# Altium PCB PCB1.PcbDoc (part 1 of 2)
Units mm, origin at the board's own origin, x right, y up, seen from the top; angles counter-clockwise.
Board outline 92.01 x 103.4 mm, 2 copper layers (Top Layer, Bottom Layer), stack 1.569 mm thick; 57 components, 56 nets, 293 pads, 87 vias.
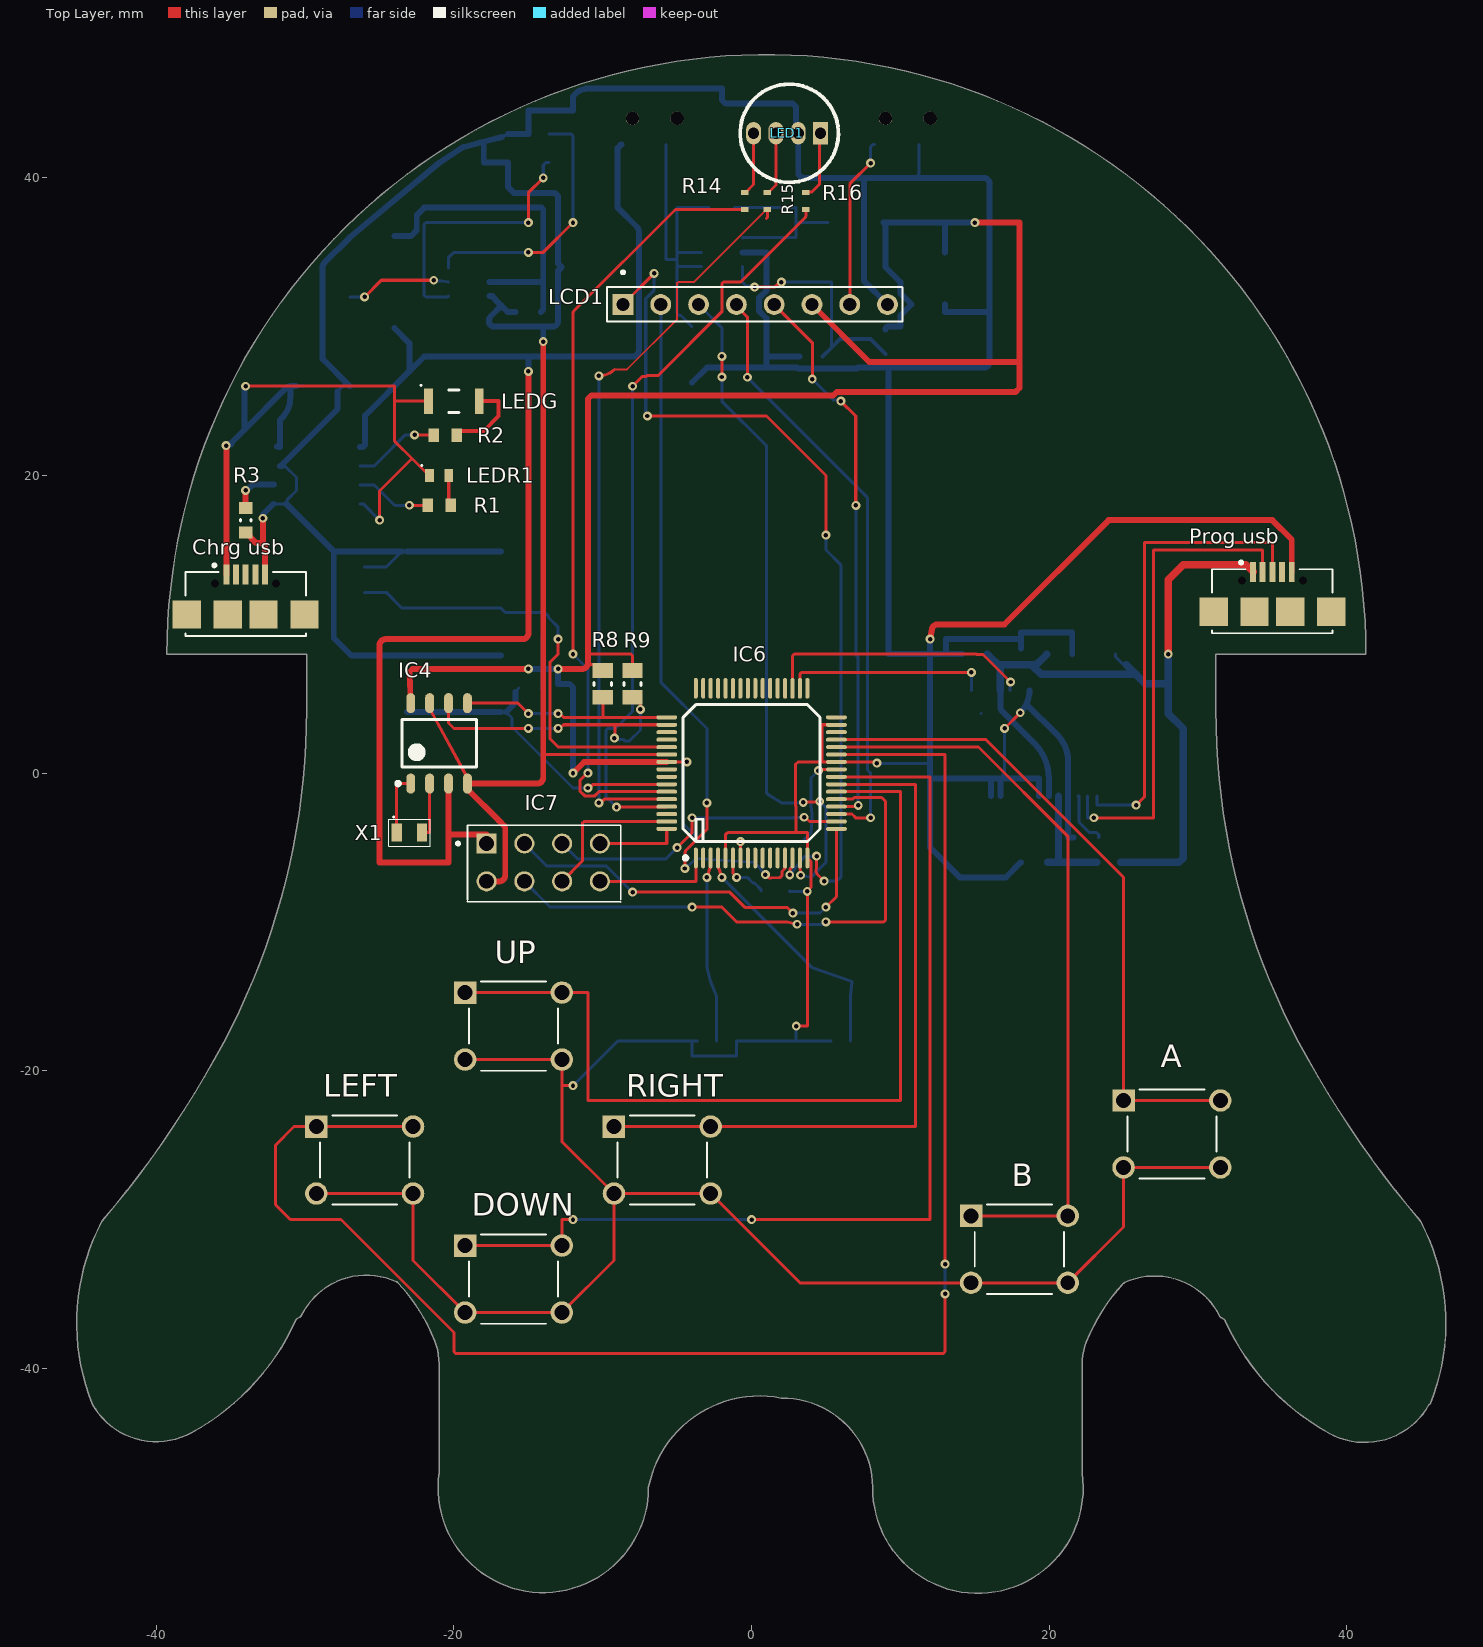
[diagram p0: Top Layer view]
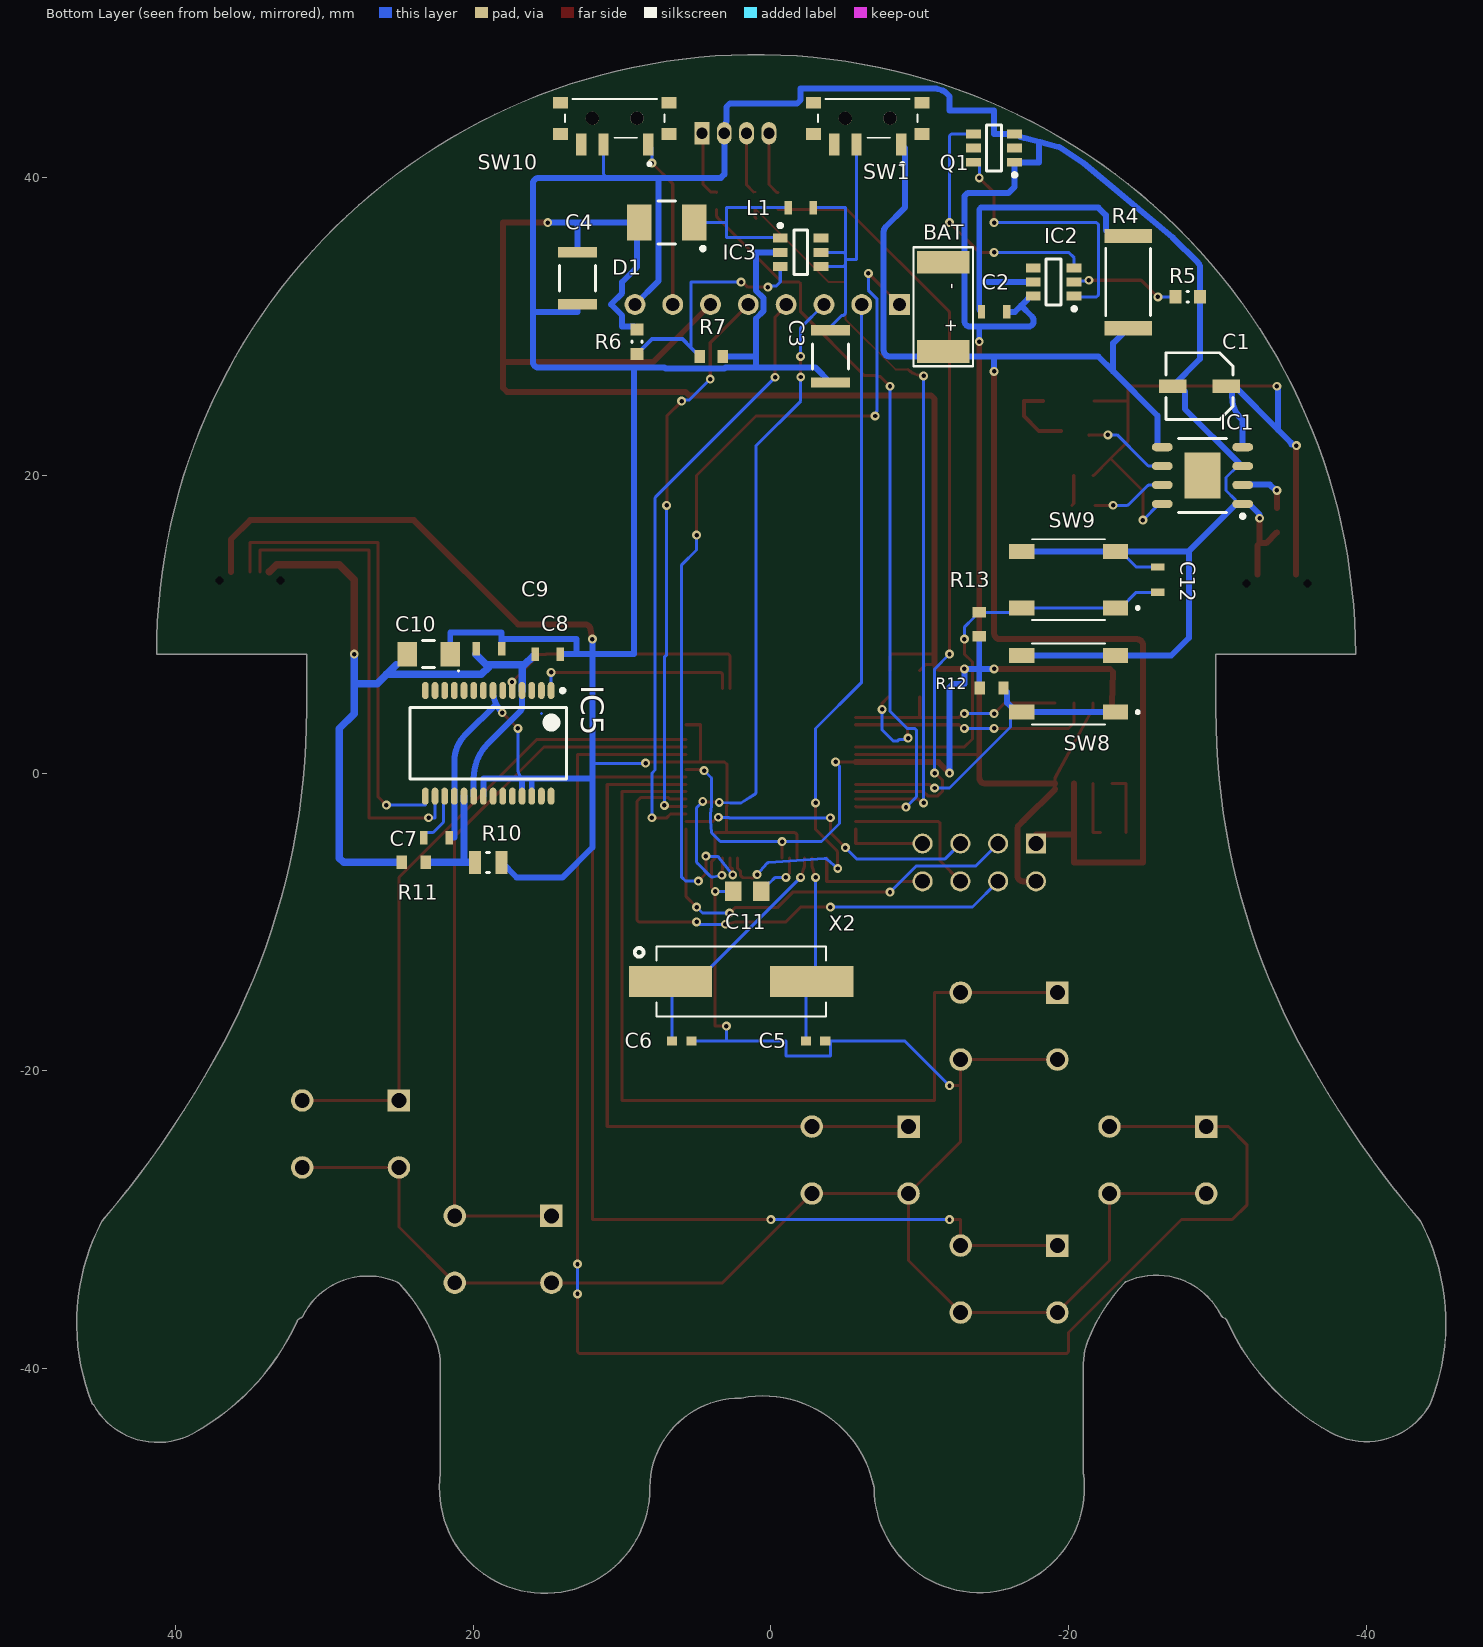
[diagram p1: Bottom Layer view, seen from below]
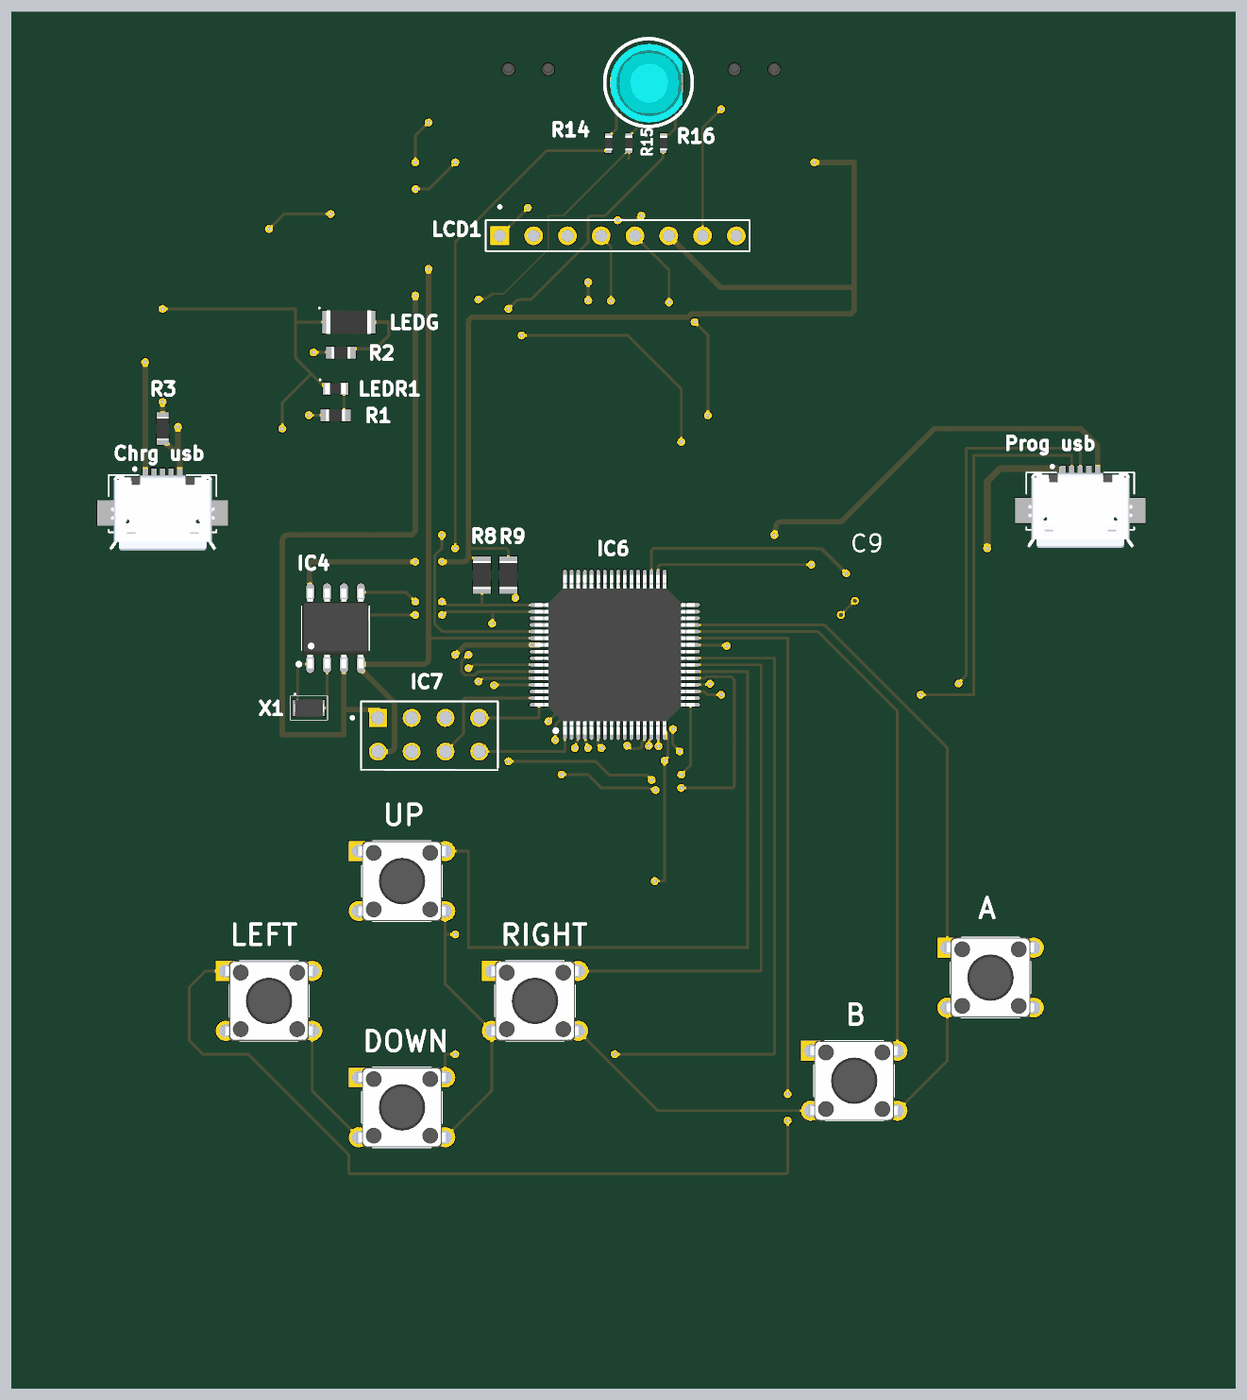
[diagram p2: 3D render of the assembled board from above, using the file's embedded part models]
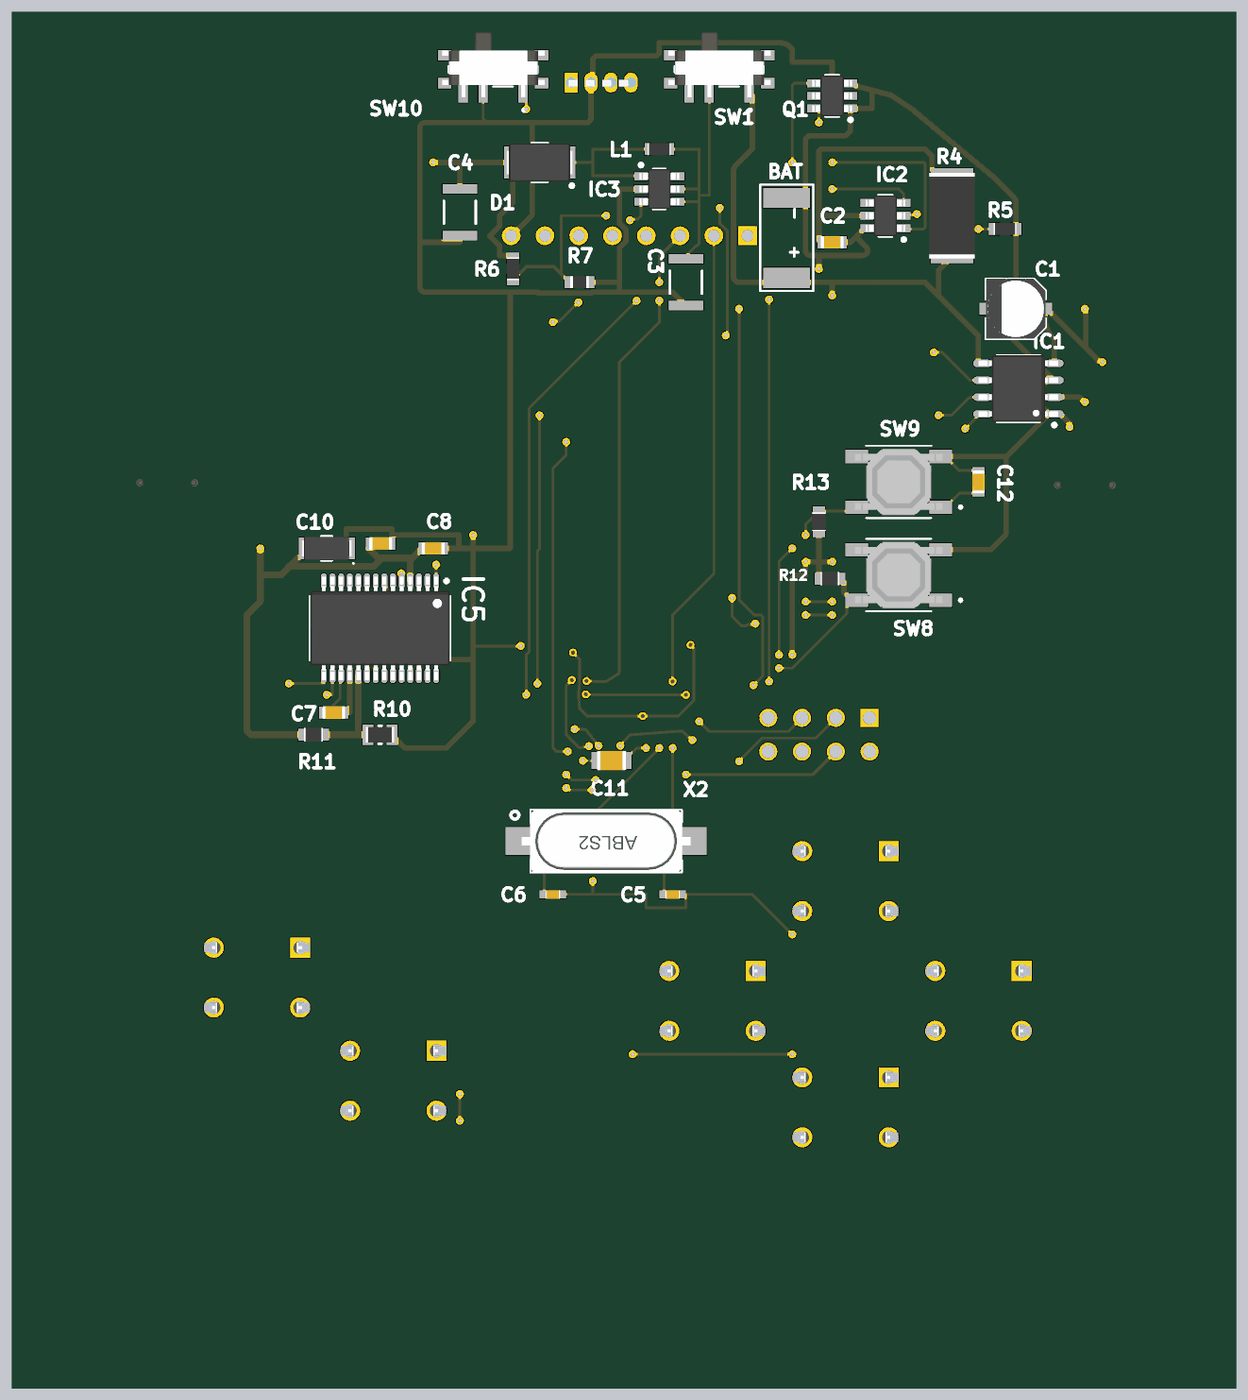
[diagram p3: 3D render of the assembled board from below, using the file's embedded part models]

## Layer stack, top to bottom
Top Solder: solder mask 0.0254, SM-001, Dk 4
Top Layer: signal copper 0.035
Dielectric 1: core 1.4986, Core-043, Dk 4.3
Bottom Layer: signal copper 0.035
Bottom Solder: solder mask 0.0254, SM-001, Dk 4

## Board outline
-44.314,-42.386 ccw(c-40,-40) -37.636,-44.326 ccw(c-45.406,-30.107) -30.633,-36.765 cw(c-30.401,-36.87) -30.522,-36.646 -30.357,-36.556 -30.356,-36.556 ccw(c-30.479,-36.333) -30.252,-36.447 cw(c-25.882,-38.619) -23.868,-34.174 cw(c-23.973,-34.405) -23.788,-34.23 cw(c-32.881,-42.76) -21.289,-38.172 cw(c-25.119,-39.687) -21,-39.687 -21,-47 ccw(c-14,-48) -6.929,-48 cw(c0.536,-49.464) 2,-42 cw(c2.069,-48.07) 8.14,-48.001 ccw(c15.211,-48.053) 22.211,-47.053 22.211,-39.742 22.211,-39.741 cw(c26.33,-39.74) 22.5,-38.225 cw(c34.092,-42.814) 24.999,-34.284 cw(c25.184,-34.458) 25.079,-34.227 cw(c27.093,-38.672) 31.463,-36.5 ccw(c31.69,-36.386) 31.567,-36.609 31.568,-36.609 31.733,-36.7 cw(c31.612,-36.923) 31.844,-36.818 ccw(c46.616,-30.16) 38.847,-44.38 ccw(c41.211,-40.053) 45.525,-42.439 45.616,-42.386 ccw(c32.061,-36.964) 44.959,-30.125 ccw(c44.735,-30.245) 44.929,-30.082 44.928,-30.081 cw(c96.298,13.612) 36.775,-18.088 cw(c78.709,4.245) 31.199,4.247 31.199,8 31.287,8 41.287,8 ccw(c1,8) -39.287,8 -29.897,8 -29.897,4.247 cw(c-77.408,4.245) -35.474,-18.088 cw(c-94.997,13.612) -43.627,-30.081 -43.628,-30.082 ccw(c-43.434,-30.245) -43.658,-30.125 ccw(c-30.76,-36.964)

## Design rules (kind name [scope] priority, off if disabled: settings)
BoardOutlineClearance [All] p1: gap=0.2 ignorepadtopadclearanceinfootprint=FALSE
Clearance [All] p1: gap=0.127 ignorepadtopadclearanceinfootprint=FALSE except(0.25: Arc-Hole Track-Hole SMDPad-Hole THPad-Hole Via-Hole Fill-Hole Poly-Hole Region-Hole Text-Hole)
ComponentClearance [All] p1: gap=0.127 collisioncheckmode=3 verticalgap=0.127 showdistances=TRUE
DiffPairsRouting [All] p1: maxlimit=0.254 minlimit=0.127 mostfreqgap=0.127 toplayer_minwidth=0.127 toplayer_maxwidth=25.4 toplayer_prefwidth=0.127 bottomlayer_minwidth=0.127 bottomlayer_maxwidth=25.4 bottomlayer_prefwidth=0.127 maxuncoupledlength=12.7
Height [All] p1: minheight=0 maxheight=1816.048 prefheight=12.7
HoleSize [All] p1: absolutevalues=TRUE maxlimit=6.3 minlimit=0.3 maxpercent=80.000 minpercent=20.000
HoleToHoleClearance [All] p1: gap=0.25 allowstackedmicrovias=FALSE
MinimumAnnularRing [All] p1: minimumring=0.076
MinimumSolderMaskSliver [All] p1: minsoldermaskwidth=0
PlaneClearance [All] p1: clearance=0.127
PlaneConnect PlaneConnectPowerPads [InPadClass('PowerPads')] p1: planeconnectstyle=Direct reliefexpansion=0.508 reliefentries=4 reliefconductorwidth=0.254 reliefairgap=0.254
PlaneConnect [All] p2: pad.planeconnectstyle=Relief pad.reliefexpansion=0.3 pad.reliefentries=4 pad.reliefconductorwidth=0.127 pad.reliefairgap=0.127 via.planeconnectstyle=Direct via.reliefexpansion=0.3 via.reliefentries=4 via.reliefconductorwidth=0.127 via.reliefairgap=0.127
PolygonConnect PolygonConnectPowerPads [All vs (InPadClass('PowerPads'))] p1: connectstyle=Direct reliefconductorwidth=0.254 reliefentries=4 polygonreliefangle="90 Angle" airgapwidth=0.254
PolygonConnect [All] p2: thpad.connectstyle=Relief thpad.reliefconductorwidth=0.127 thpad.reliefentries=4 thpad.polygonreliefangle="90 Angle" thpad.airgapwidth=0.127 smdpad.connectstyle=Relief smdpad.reliefconductorwidth=0.127 smdpad.reliefentries=4 smdpad.polygonreliefangle="90 Angle" smdpad.airgapwidth=0.127 via.connectstyle=Direct via.reliefconductorwidth=0.127 via.reliefentries=4 via.polygonreliefangle="90 Angle" via.airgapwidth=0.127
RoutingVias [All] p1: holewidth=0.3 width=0.6 viastyle="Through Hole" minholewidth=0.3 minwidth=0.6 maxholewidth=0.6 maxwidth=6.6
SilkToSilkClearance [All] p1: silktosilkclearance=0
SilkToSolderMaskClearance [IsPad] p1: minsilkscreentomaskgap=0.127 clearancetoexposedcopper=TRUE
SolderMaskExpansion [All] p1: expansion=0.075 istentingtop=FALSE
Width [All] p1: maxlimit=25.4 minlimit=0.127 preferedwidth=0.127 minimp=50.000000 maximp=50.000000 favimp=50.000000
20 further rules are at their usual default settings.

## Components (designator, comment, footprint, x,y, rotation, side; value= is the part's Value field where it differs from the comment)
A "Push button" "TACTILE BUTTON" 28.25,-24.25 r0 top (schematic designator SW7)
B "Push button" "TACTILE BUTTON" 18,-32 r0 top (schematic designator SW6)
BAT "LIPO Battery" "LIPO BATTERY PADS" -11.578,31.334 r90 bottom
C1 "10µF" ELCO -28.8,26 r0 bottom
C2 "0.1µF/100nF" MC0603B104K250CT -15,31 r180 bottom
C3 "22µF" 1210ZC226KAT2A -4,28 r270 bottom
C4 "22µF" 1210ZC226KAT2A 13,33.25 r270 bottom
C5 "33pF" 250R07S330JV4T -3,-18 r180 bottom
C6 "33pF" 250R07S330JV4T 6,-18 r180 bottom
C7 "0.1µF/100nF" MC0603B104K250CT 22.48,-4.338 r180 bottom
C8 "0.1µF/100nF" MC0603B104K250CT 15,8 r180 bottom
C9 "0.1µF/100nF" MC0603B104K250CT 18.953,8.361 r180 bottom
C10 "4.7µF" TMCUA1C475KTRF 23,8 r0 bottom
C11 "220nF" C0805C224K5RACTU 1.594,-7.937 r0 bottom
C12 "0.1µF/100nF" MC0603B104K250CT -26,13 r90 bottom
"Chrg usb" "61300411121" "MICRO USB - TYPE B" -34,12 r0 top (schematic designator USB1)
D1 "SS34" 1N5822 7,37 r0 bottom
DOWN "Push button" "TACTILE BUTTON" -16,-34 r0 top (schematic designator SW4)
IC1 "TP4056" HSOP08 -29,20 r0 bottom
IC2 "FS312F-G" SOT95P280X145-6N -19,33 r0 bottom
IC3 "MT3608" SOT23-6 -2,35 r180 bottom
IC4 "DS1307" DS1307 -21,2 r90 top
IC5 "FT232RL" SSOP28 19,2 r270 bottom
IC6 "XC888" "XC888 - 3" 0,0 r90 top
IC7 "NRF24L01" "NRF header" -14,-6 r0 top
L1 "22µH" MLZ1608 -2,38 r0 bottom
LCD1 "Nokia LCD" "LCD header" 0.249,31.488 r0 top
LED1 "RGB LED" ? 1.635,43 r270 top
LEDG "LEDG" KPT-3216SGC -20,25 r0 top
LEDR1 "LEDR" LSQ976-Z -21,20 r0 top
LEFT "Push button" "TACTILE BUTTON" -26,-26 r0 top (schematic designator SW5)
"Prog usb" "USB header" "MICRO USB - TYPE B" 35,12.187 r0 top (schematic designator USB2)
Q1 "FS8205" SOT95P280X145-6N -15,42 r0 bottom
R1 "1K" RK73H-0603 -21,18 r0 top
R2 "1K" RK73H-0603 -20.587,22.704 r0 top
R3 "2K" RC0603FR-072KL -34,17 r90 top
R4 "100" CRGP2512 -24,33 r270 bottom
R5 "2K" RC0603FR-072KL -28,32 r0 bottom
R6 "7.5K" RC0603FR-072KL 9,29 r90 bottom
R7 "1K" RK73H-0603 4,28 r0 bottom
R8 "RC0805FR-0710KL" RESC2013X60X35NL10T20 -10,6 r90 top
R9 "RC0805FR-0710KL" RESC2013X60X35NL10T20 -8,6 r90 top
R10 "10K" RC0805 19,-6 r0 bottom
R11 "4K7 R" PCF0603 24,-6 r0 bottom
R12 "4K7 R" PCF0603 -14.83,5.717 r0 bottom
R13 "4K7 R" PCF0603 -14,10 r270 bottom
R14 "270R" CRG0402F -0.468,38.451 r90 top
R15 "270R" CRG0402F 1.063,38.451 r90 top
R16 "270R" CRG0402F 3.647,38.451 r90 top
RIGHT "Push button" "TACTILE BUTTON" -6,-26 r0 top (schematic designator SW3)
SW1 "Toggle Switch" "SMD Switch" -6.5,43.65 r0 bottom
SW8 "SMD button" "TACTILE BUTTON - duplicate" -20,6 r0 bottom
SW9 "SMD button" "TACTILE BUTTON - duplicate" -20,13 r0 bottom
SW10 "Toggle Switch" "SMD Switch" 10.5,43.65 r0 bottom
UP "Push button" "TACTILE BUTTON" -16,-17 r0 top (schematic designator SW2)
X1 "32.76 KHZ" FC-12M -23,-4 r0 top
X2 "11.0592MHz" HC-49/SM 2,-14 r180 bottom

## Footprints (in the part's own frame and the unit in brackets; to place one, negate y for a bottom-side part, rotate by r counter-clockwise, add the part's x,y. Pads: shape width x height; smd on the part's side, far side on the other; paste and mask are expansions set on the pad)
1N5822 [mm] "1N5822 - SS34"
  rect 1.65x2.4 smd: 1(-1.85,0) 2(1.85,0)
  silkscreen extent -2.55,-1.45 0.6,1.87, body extent -2.52,-1.45 2.52,1.45, height 2.44
250R07S330JV4T [mm] "250R07S330JV4T - 0402 Capacitor"
  rect 0.68x0.6 smd: 1(-0.65,0) 2(0.65,0)
  body extent -0.56,-0.33 0.56,0.33, height 0.61
1210ZC226KAT2A [mm] "1210ZC226KAT2A - 1210 SMD capacitor"
  rect 0.7x2.6 smd: 1(-1.75,0) 2(1.75,0)
  silkscreen extent -0.85,-1.2 0.85,1.2, body extent -1.85,-1.4 1.85,1.4, height 0.25
C0805C224K5RACTU [mm] "C0805C224K5RACTU - 0805 SMD Capacitor"
  rect 1.1x1.3 smd: 1(-0.95,0) 2(0.95,0)
  body extent -1.1,-0.72 1.1,0.72, height 1.4
CRG0402F [mm] "CRG0402F - 0402 SMD Resistor"
  rect 0.35x0.5 smd: 1(-0.575,0) 2(0.575,0)
  body extent -0.55,-0.28 0.55,0.28, height 0.4
CRGP2512 [mm] "CRGP 2512 - SMD Resistor"
  rect 0.95x3.2 smd: 1(-3.1,0) 2(3.1,0)
  silkscreen extent -2.25,-1.5 2.25,1.5, body extent -3.22,-1.7 3.22,1.7, height 0.65
DS1307 [mm] "DS1307"
  oval 1.35x0.6 smd: 1(-2.7,1.905) 2(-2.7,0.635) 3(-2.7,-0.635) 4(-2.7,-1.905) 5(2.7,-1.905) 6(2.7,-0.635) 7(2.7,0.635) 8(2.7,1.905)
  silkscreen extent -2.82,-2.5 1.6,2.88, body extent -3,-2.5 3,2.5, height 1.75
ELCO [mm] "ELCO CAP"
  rect 1.85x0.9 smd: 1(-1.8,0) 2(1.8,0)
  silkscreen extent -2.25,-2.25 2.25,2.25, body extent -2.42,-2.25 2.42,2.25, height 6.1
FC-12M [mm] "FC-12M - Clock"
  rect 0.7x1.2 smd: 1(-0.85,0) 2(0.85,0)
  silkscreen extent -1.39,-0.9 1.4,1.1, body extent -1.11,-0.65 1.11,0.65, height 0.6
HC-49/SM [mm] "Crystal 11.0592MHz"
  rect 5.6x2.1 smd: 1(-4.75,0) 2(4.75,0)
  silkscreen extent -7.15,-2.35 5.7,2.35, body extent -6.35,-2.35 6.35,2.35, height 3.18
HSOP08 [mm] "SOP8 - TP4056"
  oval 1.4x0.55 smd: 1(-2.7,1.905) 2(-2.7,0.635) 3(-2.7,-0.635) 4(-2.7,-1.905) 5(2.7,-1.905) 6(2.7,-0.635) 7(2.7,0.635) 8(2.7,1.905)
  rect 2.41x3.1 smd: 9(0,0)
  silkscreen extent -2.82,-2.5 1.6,2.85, body extent -3,-2.5 3,2.5, height 1.7
KPT-3216SGC [mm] "SMD led"
  rect 0.6x1.7 smd: 1(-1.7,0) 2(1.7,0)
  silkscreen extent -2.26,-0.75 0.35,1.11, body extent -1.7,-0.9 1.7,0.9, height 0.95
"LCD header" [mm] "LCD header"
  rect 1.398x1.398 hole 0.89: 1(-8.89,0)
  round 1.398 hole 0.89: 2(-6.35,0) 3(-3.81,0) 4(-1.27,0) 5(1.27,0) 6(3.81,0) 7(6.35,0) 8(8.89,0)
  silkscreen extent -9.96,-1.14 9.91,2.27
"LIPO BATTERY PADS" [mm]
  rect 1.524x3.524 smd: 1(-3,0) 2(3,0)
  silkscreen extent -4,-2 4,2
LSQ976-Z [mm] "SMD - Led"
  rect 0.6x0.9 smd: 1(-0.65,0) 2(0.65,0)
  silkscreen extent -1.21,0.61 -1.11,0.71, body extent -0.8,-0.42 0.8,0.42, height 0.84
MC0603B104K250CT [mm] "0603 Capacitor"
  rect 0.5x0.9 smd: 1(-0.85,0) 2(0.85,0)
  body extent -0.87,-0.48 0.87,0.48, height 0.6
"MICRO USB - TYPE B" [mm] "Micro USB - Type B"
  rect 0.4x1.35 smd: 1(-1.3,1.338) 2(-0.65,1.338) 3(0,1.338) 4(0.65,1.338) 5(1.3,1.338)
  rect 1.9x1.9 smd: S1(-3.95,-1.338) S2(-1.2,-1.338) S3(1.2,-1.338) S4(3.95,-1.338)
  round 0.25 hole 0.55 unplated: ""(-2.05,0.75) ""(2.05,0.75)
  silkscreen extent -4.05,-2.79 4.05,2.06, body extent -4.03,-4.16 4.07,1.48, height 2.66
MLZ1608 [mm] "1608 - Inductor"
  rect 0.5x0.9 smd: 1(-0.85,0) 2(0.85,0)
  body extent -0.87,-0.48 0.87,0.48, height 0.95
"NRF header" [mm] "8 pin NRF header"
  rect 1.35x1.35 hole 1: 1(-3.81,1.27)
  round 1.35 hole 1: 2(-3.81,-1.27) 3(-1.27,1.27) 4(-1.27,-1.27) 5(1.27,1.27) 6(1.27,-1.27) 7(3.81,1.27) 8(3.81,-1.27)
  silkscreen extent -5.83,-2.67 5.21,2.5
PCF0603 [mm] "PCF0603 SMD Resistor"
  rect 0.7x0.9 smd: 1(-0.8,0) 2(0.8,0)
  body extent -0.7,-0.5 0.7,0.5, height 0.65
RC0603FR-072KL [mm] "Chip Resistor, 2-Leads, Body 1,60x0,80mm, IPC Medium Density"
  rect 0.8x0.9 smd: 1(-0.825,0) 2(0.825,0)
  silkscreen extent -0.05,-0.35 0.05,0.35, body extent -0.85,-0.45 0.85,0.45, height 0.45
RC0805 [mm] "Chip Resistor, 2-Leads, Body 2,00x1,25mm, IPC Medium Density"
  rect 0.8x1.55 smd: 1(-0.9,0) 2(0.9,0)
  silkscreen extent -0.1,-0.67 0.1,0.67, body extent -1.05,-0.58 1.05,0.58, height 0.6
RESC2013X60X35NL10T20 [mm] "Chip Resistor, 2-Leads, Body 2.1x1.35mm, IPC Medium Density"
  rect 1x1.35 smd: 1(-0.9,0) 2(0.9,0)
  silkscreen extent -0.1,-0.58 0.1,0.58, body extent -1.05,-0.68 1.05,0.67, height 0.6
RK73H-0603 [mm] "RK73H 0603 SMD Resistor"
  rect 0.7x0.9 smd: 1(-0.775,0) 2(0.775,0)
  body extent -0.7,-0.45 0.7,0.45, height 0.55
"SMD Switch" [mm] "SMD slide switch"
  rect 0.7x1.5 smd: 1(-2.25,1.4) 2(0.75,1.4) 3(2.25,1.4)
  rect 1x0.8 smd: S1(-3.65,0.7) S2(-3.65,-1.4) S3(3.65,-1.4) S4(3.65,0.7)
  round 0.9 hole 0.9 unplated: ""(-1.5,-0.35) ""(1.5,-0.35)
  silkscreen extent -3.35,-1.65 3.35,2.82, body extent -3.87,-3.15 3.83,1.75, height 1.41
SOT23-6 [mm] "SOT23-6"
  rect 1x0.6 smd: 1(-1.375,0.95) 2(-1.375,0) 3(-1.375,-0.95) 4(1.375,-0.95) 5(1.375,0) 6(1.375,0.95)
  silkscreen extent -1.5,-1.5 0.45,1.92, body extent -1.5,-1.5 1.5,1.5, height 1.45
SOT95P280X145-6N [mm] "SOT23, 6-Leads - FS8205"
  rect 1x0.6 smd: 1(-1.375,0.95) 2(-1.375,0) 3(-1.375,-0.95) 4(1.375,-0.95) 5(1.375,0) 6(1.375,0.95)
  silkscreen extent -1.5,-1.55 0.5,1.92, body extent -1.5,-1.53 1.5,1.53, height 1.45
SSOP28 [mm] "SSOP28 - FTDI"
  oval 1.15x0.45 smd: 1(-3.55,4.225) 2(-3.55,3.575) 3(-3.55,2.925) 4(-3.55,2.275) 5(-3.55,1.625) 6(-3.55,0.975) 7(-3.55,0.325) 8(-3.55,-0.325) 9(-3.55,-0.975) 10(-3.55,-1.625) 11(-3.55,-2.275) 12(-3.55,-2.925) 13(-3.55,-3.575) 14(-3.55,-4.225) 15(3.55,-4.225) 16(3.55,-3.575) 17(3.55,-2.925) 18(3.55,-2.275) 19(3.55,-1.625) 20(3.55,-0.975) 21(3.55,-0.325) 22(3.55,0.325) 23(3.55,0.975) 24(3.55,1.625) 25(3.55,2.275) 26(3.55,2.925) 27(3.55,3.575) 28(3.55,4.225)
  silkscreen extent -3.67,-5.25 2.4,5.25, body extent -3.89,-5.25 3.89,5.25, height 2
"TACTILE BUTTON" [mm] "thick button"
  rect 1.508x1.508 hole 1: 1(-3.25,2.25)
  round 1.508 hole 1: 2(3.25,2.25) 3(-3.25,-2.25) 4(3.25,-2.25)
  silkscreen extent -3,-3 3,3, body extent -3.95,-3 3.94,3, height 9.7
"TACTILE BUTTON - duplicate" [mm] "Tactile button small"
  rect 1.7x1 smd: 1(-3.15,1.9) 2(3.15,1.9) 3(-3.15,-1.9) 4(3.15,-1.9)
  silkscreen extent -4.75,-2.72 2.45,2.72, body extent -3.3,-2.5 3.3,2.5, height 1.5
TMCUA1C475KTRF [mm] "TMCUA1C475KTRF - Molded Capacitor, 2-Leads"
  rect 1.3x1.65 smd: 1(-1.45,0) 2(1.45,0)
  silkscreen extent -2.05,-0.9 0.4,1.17, body extent -1.92,-0.9 1.92,0.9, height 1
"XC888 - 3" [mm] "XC888 - 64 Pin"
  oval 1.4x0.27 smd: 1(-5.7,3.75) 2(-5.7,3.25) 3(-5.7,2.75) 4(-5.7,2.25) 5(-5.7,1.75) 6(-5.7,1.25) 7(-5.7,0.75) 8(-5.7,0.25) 9(-5.7,-0.25) 10(-5.7,-0.75) 11(-5.7,-1.25) 12(-5.7,-1.75) 13(-5.7,-2.25) 14(-5.7,-2.75) 15(-5.7,-3.25) 16(-5.7,-3.75) 33(5.7,-3.75) 34(5.7,-3.25) 35(5.7,-2.75) 36(5.7,-2.25) 37(5.7,-1.75) 38(5.7,-1.25) 39(5.7,-0.75) 40(5.7,-0.25) 41(5.7,0.25) 42(5.7,0.75) 43(5.7,1.25) 44(5.7,1.75) 45(5.7,2.25) 46(5.7,2.75) 47(5.7,3.25) 48(5.7,3.75)
  oval 0.27x1.4 smd: 17(-3.75,-5.7) 18(-3.25,-5.7) 19(-2.75,-5.7) 20(-2.25,-5.7) 21(-1.75,-5.7) 22(-1.25,-5.7) 23(-0.75,-5.7) 24(-0.25,-5.7) 25(0.25,-5.7) 26(0.75,-5.7) 27(1.25,-5.7) 28(1.75,-5.7) 29(2.25,-5.7) 30(2.75,-5.7) 31(3.25,-5.7) 32(3.75,-5.7) 49(3.75,5.7) 50(3.25,5.7) 51(2.75,5.7) 52(2.25,5.7) 53(1.75,5.7) 54(1.25,5.7) 55(0.75,5.7) 56(0.25,5.7) 57(-0.25,5.7) 58(-0.75,5.7) 59(-1.25,5.7) 60(-1.75,5.7) 61(-2.25,5.7) 62(-2.75,5.7) 63(-3.25,5.7) 64(-3.75,5.7)
  silkscreen extent -5.82,-4.6 4.6,4.6, body extent -6,-6 6,6, height 1.51
? [mm]
  rect 1.5x1 hole 0.75: 1(0,3) 1(0,3)
  oval 1.5x1 hole 0.75: 2(0,1.5) 2(0,1.5) 3(0,0) 3(0,0) 4(0,-1.5) 4(0,-1.5)
  silkscreen extent -3.3,-2.4 3.3,4.2, body extent -2.9,-2 3,3.45, height 8.61

## Part data
A B DOWN LEFT RIGHT UP: library part EVQ-PAG05R, "Switch Tactile N.O. SPST Round Button PC Pins 0.02A 15VDC 2.6N Thru-Hole Bulk", Actuator Color=Red, Contact Current Rating=20mA, Contact Resistance=50mR, Manufacturer=Panasonic, Max Operating Temperature=70°C, Max Voltage Rating (DC)=15V, Min Operating Temperature=-20°C, Operating Force=2.6N, Package Quantity=500, Supplier Part Number 1=7561543P, Actuator Length=1.6mm, Actuator Type=Standard, Category="Tactile Switches", ComponentLink1Description=https://datasheet.ciiva.com/1634/1520560-1634709.pdf?src-supplier=Farnell, ComponentLink1URL=https://datasheet.ciiva.com/1634/1520560-1634709.pdf?src-supplier=Farnell, ComponentLink2Description=https://datasheet.ciiva.com/25603/0900766b810ad3e5-25603994.pdf?src-supplier=RSComponents, ComponentLink2URL=https://datasheet.ciiva.com/25603/0900766b810ad3e5-25603994.pdf?src-supplier=RSComponents, ComponentLink3Description=https://datasheet.ciiva.com/1532/1520560-1532790.pdf?src-supplier=Element14, ComponentLink3URL=https://datasheet.ciiva.com/1532/1520560-1532790.pdf?src-supplier=Element14, ComponentLink4Description=https://datasheet.ciiva.com/24086/atk0000ce10-33274-24086442.pdf?src-supplier=Mouser, ComponentLink4URL=https://datasheet.ciiva.com/24086/atk0000ce10-33274-24086442.pdf?src-supplier=Mouser, ComponentLink5Description=https://datasheet.ciiva.com/2901/atk0000ce10-2901437.pdf?src-supplier=Digi-Key, ComponentLink5URL=https://datasheet.ciiva.com/2901/atk0000ce10-2901437.pdf?src-supplier=Digi-Key, ComponentLink6Description=https://datasheet.ciiva.com/30192/36atk0000ce10-30192373.pdf?src-supplier=Onlinecomponents.com, ComponentLink6URL=https://datasheet.ciiva.com/30192/36atk0000ce10-30192373.pdf?src-supplier=Onlinecomponents.com, ComponentLink7Description=https://datasheet.ciiva.com/8166/atk0000ce10-8166366.pdf?src-supplier=Avnet, ComponentLink7URL=https://datasheet.ciiva.com/8166/atk0000ce10-8166366.pdf?src-supplier=Avnet, ComponentLink8Description=https://datasheet.ciiva.com/16976/70270700-16976175.pdf?src-supplier=Allied+Electronics, ComponentLink8URL=https://datasheet.ciiva.com/16976/70270700-16976175.pdf?src-supplier=Allied+Electronics, Contact Plating=Silver, Current Rating=20mA, Depth=6.5mm, Electrical Life=50000Cycles, Height=5mm, Illumination Type=Non-Illuminated, Lead Free="Lead Free", Length=6mm, Manufacturer Part Number=EVQ-PAG05R, Max Current Rating=20mA, Mechanical Life=50000Cycles, Mount="Through Hole", Orientation=Straight, Packaging=Bulk, Pricing 1="50=0,24100, 500=0,18100 (USD)", Radiation Hardening=No, REACH SVHC="No SVHC", RoHS=Yes, RoHS Compliant=Yes, Series=EVQPA, Size=6mm, Stock 1=1, Supplier 1=RSComponents, Switch Function=Off-Mom, Switch Travel=0.25mm, Termination="PC Pin", Throw Configuration=SPST, Voltage Rating (DC)=15V, Width=6mm
BAT: library part "103040 LIPO battery"
C1: library part 35TZV10M4X6.1, "RUBYCON - 35TZV10M4X6.1 - KONDENSATOR, 10µF, 35V, RADIAL, SMD", Capacitance=10uF, Case/Package=Radial, Manufacturer=Rubycon, Max Operating Temperature=105°C, Min Operating Temperature=-55°C, Package Quantity=2000, Ripple Current=90mA, Supplier Part Number 1=08X5009, Tolerance=20%, Voltage Rating=35V, Category="Aluminum Electrolytic Capacitors", ComponentLink1Description=https://datasheet.ciiva.com/26878/getdatasheetpartid-443596-26878330.pdf?src-supplier=Verical, ComponentLink1URL=https://datasheet.ciiva.com/26878/getdatasheetpartid-443596-26878330.pdf?src-supplier=Verical, ComponentLink2Description=https://datasheet.ciiva.com/17514/e-tzv-17514469.pdf?src-supplier=Avnet+Europe, ComponentLink2URL=https://datasheet.ciiva.com/17514/e-tzv-17514469.pdf?src-supplier=Avnet+Europe, ComponentLink3Description=https://datasheet.ciiva.com/22732/1725814-22732219.pdf?src-supplier=Element14, ComponentLink3URL=https://datasheet.ciiva.com/22732/1725814-22732219.pdf?src-supplier=Element14, Construction=Cylindrical, Diameter=4mm, Height=6.1mm, Height - Seated (Max)=0.24inch, Impedance=1.45R, Lead Free="Lead Free", Life (Hours)=2000Hour, Manufacturer Part Number=35TZV10M4X6.1, Mount="Surface Mount", Number of Pins=2, Packaging="Cut Tape", Pricing 1="5=0,37000, 10=0,25400, 25=0,21600, 50=0,17800, 100=0,15200 (USD)", Radiation Hardening=No, REACH SVHC="No SVHC", Ripple Current (AC)=90mA, RoHS=Yes, RoHS Compliant=Yes, Series=TZV, Stock 1=365, Supplier 1=Newark, Voltage Rating (DC)=35V
C2 C7 C8 C9 C12: library part MC0603B104K250CT, "Cap Ceramic 0.1uF 25V X7R 10% Pad SMD 0603 125C T/R", Capacitance=100nF, Case Code (Imperial)=0603, Case Code (Metric)=1608, Dielectric=X7R, Manufacturer=Multicomp, Max Operating Temperature=125°C, Min Operating Temperature=-55°C, Supplier Part Number 1=94W8728, Tolerance=10%, Voltage Rating=25V, Case/Package=0603, Category="Ceramic Capacitors", ComponentLink1Description=https://datasheet.ciiva.com/22686/1901289-22686277.pdf?src-supplier=Element14, ComponentLink1URL=https://datasheet.ciiva.com/22686/1901289-22686277.pdf?src-supplier=Element14, ComponentLink2Description=https://datasheet.ciiva.com/22648/1901289-22648410.pdf?src-supplier=Element14, ComponentLink2URL=https://datasheet.ciiva.com/22648/1901289-22648410.pdf?src-supplier=Element14, Manufacturer Part Number=MC0603B104K250CT, Number of Pins=2, Packaging="Cut Tape", Pricing 1="1=0,00300, 4000=0,00300, 8000=0,00300, 20000=0,00300 (USD)", REACH SVHC=Unknown, RoHS=Yes, RoHS Compliant=Yes, Series=MLCC, Stock 1=124000, Supplier 1=Newark, Voltage Rating (DC)=25V, Width=0.8mm
C3 C4: library part 1210ZC226KAT2A, "1210 22 uF 10 V ±10 % Tolerance X7R Surface Mount Multilayer Ceramic Capacitor", Capacitance=22uF, Case Code (Imperial)=1210, Case Code (Metric)=3225, Dielectric=X7R, Manufacturer="Kyocera AVX", Max Operating Temperature=125°C, Min Operating Temperature=-55°C, Package Quantity=1, Supplier Part Number 1=95W9441, Tolerance=10%, Voltage=10V, Case/Package=1210, Category="Ceramic Capacitors", ComponentLink1Description=https://datasheet.ciiva.com/11499/cx7r-11499965.pdf?src-supplier=Avnet, ComponentLink1URL=https://datasheet.ciiva.com/11499/cx7r-11499965.pdf?src-supplier=Avnet, ComponentLink2Description=https://datasheet.ciiva.com/28592/1679506-28592703.pdf?src-supplier=Element14, ComponentLink2URL=https://datasheet.ciiva.com/28592/1679506-28592703.pdf?src-supplier=Element14, ComponentLink3Description=https://datasheet.ciiva.com/5421/cx7r-5421062.pdf?src-supplier=Mouser, ComponentLink3URL=https://datasheet.ciiva.com/5421/cx7r-5421062.pdf?src-supplier=Mouser, ComponentLink4Description=https://datasheet.ciiva.com/14887/cx7r-14887591.pdf?src-supplier=Digi-Key, ComponentLink4URL=https://datasheet.ciiva.com/14887/cx7r-14887591.pdf?src-supplier=Digi-Key, ComponentLink5Description=https://datasheet.ciiva.com/28592/1679506-28592903.pdf?src-supplier=Element14, ComponentLink5URL=https://datasheet.ciiva.com/28592/1679506-28592903.pdf?src-supplier=Element14, ComponentLink6Description=https://datasheet.ciiva.com/14887/cx7r-14887593.pdf?src-supplier=Digi-Key, ComponentLink6URL=https://datasheet.ciiva.com/14887/cx7r-14887593.pdf?src-supplier=Digi-Key, ComponentLink7Description=https://datasheet.ciiva.com/7614/cx7r-7614701.pdf?src-supplier=Digi-Key, ComponentLink7URL=https://datasheet.ciiva.com/7614/cx7r-7614701.pdf?src-supplier=Digi-Key, ComponentLink8Description=https://datasheet.ciiva.com/11499/cx7r-11499966.pdf?src-supplier=Avnet, ComponentLink8URL=https://datasheet.ciiva.com/11499/cx7r-11499966.pdf?src-supplier=Avnet, ComponentLink9Description=https://datasheet.ciiva.com/16301/cx7r-16301534.pdf?src-supplier=Future+Electronics, ComponentLink9URL=https://datasheet.ciiva.com/16301/cx7r-16301534.pdf?src-supplier=Future+Electronics, Construction=Flat, Depth=2.5mm, Lead Free="Lead Free", Length=3.2mm, Manufacturer Part Number=1210ZC226KAT2A, Mount="Surface Mount", Number of Pins=2, Packaging="Tape and Reel", Pricing 1="1=1,79000, 10=1,46000, 25=1,36000 (USD)", Radiation Hardening=No, REACH SVHC=Unknown, RoHS=Yes, RoHS Compliant=Yes, Series=-, Stock 1=240, Supplier 1=Newark, Termination=SMD/SMT, Thickness=0.11inch, Voltage Rating=10V, Voltage Rating (DC)=10V, Width=0.098inch
C5 C6: library part 500R07S330JV4T, "Cap Ceramic 33pF 50V C0G 5% Pad SMD 0402 125°C Ultra Low ESR T/R", Case Code (Imperial)=0402, Case Code (Metric)=1005, Dielectric=C0G, Manufacturer=Johanson, Max Operating Temperature=125°C, Min Operating Temperature=-55°C, Package Quantity=1, Supplier Part Number 1=51Y5225, Tolerance=5%, Voltage Rating=50V, Capacitance=33pF, Case/Package=0402, Category="Ceramic Capacitors", ComponentLink1Description=https://datasheet.ciiva.com/46417/1731432-46417670.pdf?src-supplier=Element14, ComponentLink1URL=https://datasheet.ciiva.com/46417/1731432-46417670.pdf?src-supplier=Element14, Depth=0.51mm, Height=0.64mm, Length=1.02mm, Manufacturer Part Number=500R07S330JV4T, Mount="Surface Mount", Packaging="Tape and Reel", Pricing 1="1=0,22000, 10=0,15400, 25=0,12900, 50=0,10400, 100=0,07900 (USD)", REACH SVHC="No SVHC", RoHS=Yes, Stock 1=2779, Supplier 1=Newark, Termination=SMD/SMT, Thickness=0.024inch, Voltage Rating (DC)=50V, Width=0.02inch
C10: library part TMCUA1C475KTRF, "Cap Tant Solid 4.7uF 16V UA CASE 10% (3.2 X 1.6 X 1.2mm) Inward L SMD 3216-12 4 Ohm 125C T/R", Capacitance=4.7uF, Case Code (Imperial)=1206, Case Code (Metric)=3216, ESR (Equivalent Series Resistance)=4R, Manufacturer=Vishay, Max Operating Temperature=125°C, Min Operating Temperature=-55°C, Supplier Part Number 1=1882042, Tolerance=10%, Voltage Rating=16V, Case/Category=1206, Category="Tantalum Capacitors", ComponentLink1Description=http://www.farnell.com/datasheets/1948249.pdf?src-supplier=Farnell, ComponentLink1URL=http://www.farnell.com/datasheets/1948249.pdf?src-supplier=Farnell, ComponentLink2Description=http://www.farnell.com/datasheets/1948249.pdf?src-supplier=Element14, ComponentLink2URL=http://www.farnell.com/datasheets/1948249.pdf?src-supplier=Element14, Manufacturer Part Number=TMCUA1C475KTRF, Mount="Surface Mount", Packaging="Cut Tape", Pricing 1="3000=0,10600, 6000=0,10300 (USD)", REACH SVHC=Unknown, RoHS=Yes, RoHS Compliant=Yes, Stock 1=1, Supplier 1=RSComponents, Voltage Rating (DC)=16V
C11: library part C0805C224K5RACTU, "0805 C 220nF Ceramic Multilayer Capacitor; 50 VDC; +125degC; X7R Dielec; +/-10%", Case Code (Imperial)=0805, Case Code (Metric)=2012, Dielectric=X7R, Dielectric Material=Ceramic, Manufacturer=KEMET, Max Operating Temperature=125°C, Min Operating Temperature=-55°C, Package Quantity=1, Supplier Part Number 1=8029927, Tolerance=10%, Voltage=50V, Capacitance=220nF, Case/Package=0805, Category="Ceramic Capacitors", ComponentLink1Description=https://datasheet.ciiva.com/7842/kem-c1002-x7r-smd-7842582.pdf?src-supplier=Element14, ComponentLink1URL=https://datasheet.ciiva.com/7842/kem-c1002-x7r-smd-7842582.pdf?src-supplier=Element14, ComponentLink2Description=https://datasheet.ciiva.com/18193/getdatasheetpartid-304413-18193686.pdf?src-supplier=Verical, ComponentLink2URL=https://datasheet.ciiva.com/18193/getdatasheetpartid-304413-18193686.pdf?src-supplier=Verical, Construction=Flat, Depth=1.25mm, Dissipation Factor=2.5%, Height=1.1mm, Lead Pitch=0.75mm, Length=2mm, Manufacturer Part Number=C0805C224K5RACTU, Mount="Surface Mount,PCB", Packaging="Tape and Reel", Pricing 1="500=0,04800, 2500=0,03900 (USD)", Radiation Hardening=No, REACH SVHC="No SVHC", RoHS=Yes, RoHS Compliant=Yes, Series=C, Stock 1=18500, Supplier 1=RSComponents, Termination=SMD/SMT, Thickness=0.055inch, Voltage Rating=50V, Voltage Rating (DC)=50V, Width=0.049inch
"Chrg usb": "CONN HEADER 4 POS 2.54", Color=Black, Manufacturer="Wurth Electronics", Supplier Part Number 1=8281594, Category="Headers and Wire Housings", ComponentLink1Description=http://www.farnell.com/cad/1737268.pdf?src-supplier=Element14, ComponentLink1URL=http://www.farnell.com/cad/1737268.pdf?src-supplier=Element14, ComponentLink2Description=https://katalog.we-online.de/em/datasheet/6130xx11121.pdf?src-supplier=Digi-Key, ComponentLink2URL=https://katalog.we-online.de/em/datasheet/6130xx11121.pdf?src-supplier=Digi-Key, Connector Type="Male Pin", Contact Material=Copper, Contact Mating Length=0.236inch, Contact Plating=Gold, Gender=Male, Lead Free="Lead Free", Manufacturer Part Number=61300411121, Mount="Through Hole", Number of Contacts=4, Number of Positions=4, Number of Rows=1, Packaging=Bulk, Pitch=0.1inch, Pricing 1="5=0,19600, 250=0,08000, 500=0,07800, 2500=0,07500, 5000=0,07200 (USD)", REACH SVHC=Unknown, RoHS=Yes, RoHS Compliant=Yes, Stock 1=380, Supplier 1=RSComponents, Termination=Solder
D1: library part SS34-E3/57T, "DIODE SCHOTTKY 40V 3A DO214AB", Average Rectified Current=3A, Case/Package=SMC, Forward Voltage=500mV, Manufacturer="Vishay Semiconductors", Max Forward Surge Current (Ifsm)=100A, Max Operating Temperature=125°C, Max Repetitive Reverse Voltage (Vrrm)=40V, Max Reverse Current=500uA, Min Operating Temperature=-55°C, Package Quantity=1, Category="Rectifier Diodes", ComponentLink1Description=https://datasheet.ciiva.com/15144/getdatasheetpartid-73598-15144471.pdf?src-supplier=Verical, ComponentLink1URL=https://datasheet.ciiva.com/15144/getdatasheetpartid-73598-15144471.pdf?src-supplier=Verical, ComponentLink2Description=https://datasheet.ciiva.com/4244/ss32-4244863.pdf?src-supplier=Arrow+Electronics, ComponentLink2URL=https://datasheet.ciiva.com/4244/ss32-4244863.pdf?src-supplier=Arrow+Electronics, ComponentLink3Description=https://datasheet.ciiva.com/17077/ss34-e3-57t-17077951.pdf?src-supplier=Allied+Electronics, ComponentLink3URL=https://datasheet.ciiva.com/17077/ss34-e3-57t-17077951.pdf?src-supplier=Allied+Electronics, ComponentLink4Description=https://datasheet.ciiva.com/26788/ss34-e3-57t-26788786.pdf?src-supplier=IIIC, ComponentLink4URL=https://datasheet.ciiva.com/26788/ss34-e3-57t-26788786.pdf?src-supplier=IIIC, ComponentLink5Description=https://datasheet.ciiva.com/26295/1697107-26295413.pdf?src-supplier=Element14, ComponentLink5URL=https://datasheet.ciiva.com/26295/1697107-26295413.pdf?src-supplier=Element14, Contact Plating=Tin,Matte, Current=3A, Current Rating=3A, Element Configuration=Single, Forward Current=3A, Height=2.417mm, Lead Free="Lead Free", Length=7.11mm, Manufacturer Part Number=SS34-E3/57T, Max Reverse Leakage Current=500uA, Max Reverse Voltage (DC)=40V, Max Surge Current=100A, Mount="Surface Mount", Number of Pins=2, Output Current=3A, Packaging="Tape and Reel", Peak Non-Repetitive Surge Current=100A, Polarity=Standard, Pricing 1="20=0,52900, 180=0,38200, 420=0,36100 (USD)", Radiation Hardening=No, REACH SVHC=Unknown, RoHS=Yes, Stock 1=1120, Supplier 1=RSComponents, Voltage=40V, Voltage Rating (DC)=40V, Width=6.22mm
IC1: Case/Package=ESOP8, Category="Battery Management"
IC2: "Lithium battery protection IC", Case/Package=SOT23-6, Category="Protection IC"
IC3: "Voltage regulator", Case/Package=SOT23-6, Category="Voltage regulator"
IC4: library part DS1307ZNTR, "IC RTC SERIAL 512K IND 8-SOIC", Case/Package=SOIC, Manufacturer=Maxim, Max Operating Temperature=85°C, Max Supply Voltage=5.5V, Min Operating Temperature=-40°C, Min Supply Voltage=4.5V, Operating Supply Voltage=5V, Package Quantity=2500, Supplier Part Number 1=DS1307ZN+T&R-ND, Voltage=7V, Category="Real Time Clocks", ComponentLink1Description=https://datasheet.ciiva.com/1243/ds1307-1243264.pdf?src-supplier=Digi-Key, ComponentLink1URL=https://datasheet.ciiva.com/1243/ds1307-1243264.pdf?src-supplier=Digi-Key, ComponentLink2Description=https://datasheet.ciiva.com/18633/ds1307-18633131.pdf?src-supplier=Digi-Key, ComponentLink2URL=https://datasheet.ciiva.com/18633/ds1307-18633131.pdf?src-supplier=Digi-Key, ComponentLink3Description=https://datasheet.ciiva.com/3304/ds1307-3304460.pdf?src-supplier=Avnet, ComponentLink3URL=https://datasheet.ciiva.com/3304/ds1307-3304460.pdf?src-supplier=Avnet, ComponentLink4Description=https://datasheet.ciiva.com/18633/ds1307-18633132.pdf?src-supplier=Digi-Key, ComponentLink4URL=https://datasheet.ciiva.com/18633/ds1307-18633132.pdf?src-supplier=Digi-Key, ComponentLink5Description=https://datasheet.ciiva.com/28652/1647366-28652551.pdf?src-supplier=Element14, ComponentLink5URL=https://datasheet.ciiva.com/28652/1647366-28652551.pdf?src-supplier=Element14, Contact Plating=Tin,Matte, Date Format=YY-MM-DD-dd, Interface=I2C,Serial,2-Wire, Lead Free="Lead Free", Logic Function=Clock, Manufacturer Part Number=DS1307ZNTR, Memory Size=56B, Mount="Surface Mount", Number of Pins=8, Packaging="Tape and Reel", Radiation Hardening=No, REACH SVHC=Unknown, RoHS=Yes, Series=-, Supplier 1=Digi-Key, Time Format=HH:MM:SS, Weight=0.019048oz
IC5: "Usb Interface Ics Usb to Serial Uart 28 Pin SSOP", Case/Package=SSOP, Manufacturer=FTDI, Max Operating Temperature=85°C, Max Supply Voltage=5.25V, Min Operating Temperature=-40°C, Min Supply Voltage=1.8V, Nominal Supply Current=15mA, Supplier Part Number 1=0406580, Voltage=5V, Bandwidth=48MHz, Category="Interface ICs", ComponentLink1Description=https://datasheet.ciiva.com/14094/ft232r-eng-tds-14094039.pdf?src-supplier=Distrelec, ComponentLink1URL=https://datasheet.ciiva.com/14094/ft232r-eng-tds-14094039.pdf?src-supplier=Distrelec, Data Rate=3Mbps, Height=1.75mm, Interface=UART, Lead Free="Lead Free", Length=10.2mm, Manufacturer Part Number=FT232RL, Mount="Surface Mount", Number of Drivers=1, Number of Pins=28, Number of Receivers=1, Packaging="Cut Tape", Pricing 1="1=4,97300, 20=4,11500, 100=3,90000, 500=3,61900, 1000=3,55200 (USD)", REACH SVHC="No SVHC", RoHS=No, Stock 1=12, Supplier 1=RSComponents, Width=5.3mm
IC6: library part XC8888FFI5VACFXUMA1, "MCU 8-Bit XC800 8051 CISC 32KB Flash 2.5V/5V 64-Pin LQFP T/R", Case/Package=TQFP, Manufacturer=Infineon, Max Frequency=24MHz, Max Operating Temperature=85°C, Max Supply Voltage=5.5V, Min Operating Temperature=-40°C, Min Supply Voltage=2.3V, Operating Supply Voltage=5V, Package Quantity=1900, Supplier Part Number 1=XC8888FFI5VACFXUMA1TR-ND, Category=Microcontrollers, ComponentLink1Description=https://www.verical.com/server-webapp/html/getDatasheet?partID=753198&src-supplier=Verical, ComponentLink1URL=https://www.verical.com/server-webapp/html/getDatasheet?partID=753198&src-supplier=Verical, ComponentLink2Description=http://components.arrow.com/part/dataview/0323_00171966?src-supplier=Arrow+Europe, ComponentLink2URL=http://components.arrow.com/part/dataview/0323_00171966?src-supplier=Arrow+Europe, ComponentLink3Description=http://components.arrow.com/part/dataview/52118966S8474747N2051?src-supplier=Arrow+Electronics, ComponentLink3URL=http://components.arrow.com/part/dataview/52118966S8474747N2051?src-supplier=Arrow+Electronics, ComponentLink4Description=https://www.infineon.com/dgdl/Infineon-XC88XCLM-DS-v01_02-en.pdf?fileId=db3a304412b407950112b40c4a9e0afb&src-supplier=Digi-Key, ComponentLink4URL=https://www.infineon.com/dgdl/Infineon-XC88XCLM-DS-v01_02-en.pdf?fileId=db3a304412b407950112b40c4a9e0afb&src-supplier=Digi-Key, ComponentLink5Description=http://www.infineon.com/dgdl/Infineon-XC88XCLM-DS-v01_02-en.pdf?fileId=db3a304412b407950112b40c4a9e0afb&ack=t&src-supplier=Avnet+Europe, ComponentLink5URL=http://www.infineon.com/dgdl/Infineon-XC88XCLM-DS-v01_02-en.pdf?fileId=db3a304412b407950112b40c4a9e0afb&ack=t&src-supplier=Avnet+Europe, ComponentLink6Description=http://www.infineon.com/dgdl/Infineon-XC88XCLM-DS-v01_02-en.pdf?fileId=db3a304412b407950112b40c4a9e0afb&ack=t&src-supplier=Avnet, ComponentLink6URL=http://www.infineon.com/dgdl/Infineon-XC88XCLM-DS-v01_02-en.pdf?fileId=db3a304412b407950112b40c4a9e0afb&ack=t&src-supplier=Avnet, Core Architecture=8051, Data Bus Width=8b, Halogen Free="Halogen Free", Interface=UART,USART,SPI, Manufacturer Part Number=XC8888FFI5VACFXUMA1, Memory Size=32KB, Memory Type=FLASH, Number of Pins=64, Number of Programmable I/O=48, Number of Timers/Counters=4, Oscillator Type=Internal, Packaging="Tape and Reel", Peripherals="Brown-out Detect/Reset,POR,PWM,WDT", Pricing 1="1900=2,88420 (USD)", RAM Size=1.75KB, RoHS=Yes, RoHS Compliant=Yes, Series=XC8xx, Supplier 1=Digi-Key, Watchdog Timer=Yes
IC7: library part "NRF24L01 Module"
L1: library part MLZ1608N220LT000, "Inductor Power Shielded Multi-Layer 22uH 20% 2MHz Ferrite 0.05A 2.145Ohm DCR 0603 T/R", Case Code (Imperial)=0603, Case Code (Metric)=1608, Current Rating=300mA, DC Resistance (DCR)=2.145R, Inductance=22uH, Manufacturer=TDK, Max Operating Temperature=125°C, Min Operating Temperature=-55°C, Package Quantity=4000, Saturation Current=50mA, Test Frequency=2MHz, Tolerance=20%, Case/Package=0603, Category="Fixed Inductors", ComponentLink1Description=https://datasheet.ciiva.com/41832/inductor-commercial-decoupling-mlz-en-41832797.pdf?src-supplier=Digi-Key, ComponentLink1URL=https://datasheet.ciiva.com/41832/inductor-commercial-decoupling-mlz-en-41832797.pdf?src-supplier=Digi-Key, Core Material=Ferrite, Height=0.8mm, Height - Seated (Max)=0.037inch, Lead Free="Lead Free", Length=0.063inch, Manufacturer Part Number=MLZ1608N220LT000, Mount="Surface Mount", Packaging="Tape and Reel", Pricing 1="1=0,15380, 10=0,10450, 25=0,10350, 100=0,08320, 250=0,08240, 500=0,07410, 1000=0,06230, 3000=0,06170 (USD)", RoHS=Yes, RoHS Compliant=Yes, Shielding=Shielded, Stock 1=3800, Supplier 1="Arrow Electronics", Supplier Part Number 1=MLZ1608N220LT000, Termination=SMD/SMT, Weight=0.000141oz, Width=0.031inch
LCD1: library part "Nokia 5110 LCD", "Nokia 5110 LCD", Category="LCD Display"
LED1: library part WP154A4SUREQBFZGC, "Hyper Red/Green/Blue 50º Water Clear Full Color LED Lamp - T-1 3/4", Case/Package=Radial, Color=Blue,Green,Red, Forward Current=20mA, Forward Voltage=4V, Manufacturer=Kingbright, Max Operating Temperature=85°C, Min Operating Temperature=-40°C, Package Quantity=500, Power Rating=120mW, Reverse Voltage (DC)=5V, Supplier Part Number 1=754-1615-ND, Category=LEDs, ComponentLink1Description=https://datasheet.ciiva.com/6349/wp154a4sureqbfzgc-6349426.pdf?src-supplier=Digi-Key, ComponentLink1URL=https://datasheet.ciiva.com/6349/wp154a4sureqbfzgc-6349426.pdf?src-supplier=Digi-Key, ComponentLink2Description=https://datasheet.ciiva.com/13501/wp154a4sureqbfzgc-194997-13501708.pdf?src-supplier=Mouser, ComponentLink2URL=https://datasheet.ciiva.com/13501/wp154a4sureqbfzgc-194997-13501708.pdf?src-supplier=Mouser, Dominant Wavelength=465nm, Height=8.6mm, Lead Free="Lead Free", Lens Style=Dome, Lens Transparency=Clear, Luminous Intensity=500mcd, Manufacturer Part Number=WP154A4SUREQBFZGC, Mount="Through Hole", Operating Supply Voltage=4V, Packaging=Bulk, Pricing 1="1=1,98000, 10=1,25100, 100=0,92560, 500=0,85054, 1000=0,70800 (USD)", RoHS=Yes, RoHS Compliant=Yes, Stock 1=39551, Supplier 1=Digi-Key, Test Current=20mA, Viewing Angle=60°, Weight=0.01411oz
LEDG: library part KPT-3216SGC, "LED Uni-Color SB. Green 565nm 2-Pin Chip LED T/R", Case/Package=3216, Color=Green, Forward Current=20mA, Forward Voltage=2.2V, Lens Color=Clear, Manufacturer=Kingbright, Supplier Part Number 1=8610204P, Category=LEDs, ComponentLink1Description=https://datasheet.ciiva.com/23674/1563720-23674567.pdf?src-supplier=Newark, ComponentLink1URL=https://datasheet.ciiva.com/23674/1563720-23674567.pdf?src-supplier=Newark, Dominant Wavelength=568nm, Lens Style=Rectangular,Diffused,Colorless, Luminous Intensity=12mcd, Manufacturer Part Number=KPT-3216SGC, Mount="Surface Mount", Number of LEDs=1, Number of Pins=2, Packaging="Tape and Reel", Pricing 1="100=0,14200, 500=0,13500, 1000=0,11800, 2000=0,10700, 8000=0,10500 (USD)", Radiation Hardening=No, REACH SVHC="No SVHC", RoHS=Yes, RoHS Compliant=Yes, Series=1206, Stock 1=1, Supplier 1=RSComponents, Viewing Angle=120°, Wavelength=568nm
LEDR1: library part LSQ976-Z, "Led, SMD, Red, 180MCD, 633NM", Color=Red, Forward Current=20mA, Forward Voltage=2V, Manufacturer="Osram Opto", Category=LEDs, ComponentLink1Description=https://datasheet.ciiva.com/8060/24682-8060069.pdf?src-supplier=Element14, ComponentLink1URL=https://datasheet.ciiva.com/8060/24682-8060069.pdf?src-supplier=Element14, ComponentLink2Description=https://datasheet.ciiva.com/8060/24682-8060070.pdf?src-supplier=Element14, ComponentLink2URL=https://datasheet.ciiva.com/8060/24682-8060070.pdf?src-supplier=Element14, Dominant Wavelength=633nm, Lens Style=Rectangular,Diffused,Colorless, Luminous Intensity=180mcd, Manufacturer Part Number=LSQ976-Z, Mount="Surface Mount", Number of LEDs=1, Number of Pins=2, Packaging="Cut Tape", REACH SVHC="No SVHC", RoHS=Yes, Supplier 1=Avnet, Supplier Part Number 1=LSQ976-Z, Viewing Angle=160°, Wavelength=633nm
"Prog usb": library part 61300411121, "CONN HEADER 4 POS 2.54", Color=Black, Manufacturer="Wurth Electronics", Supplier Part Number 1=8281594, Category="Headers and Wire Housings", ComponentLink1Description=http://www.farnell.com/cad/1737268.pdf?src-supplier=Element14, ComponentLink1URL=http://www.farnell.com/cad/1737268.pdf?src-supplier=Element14, ComponentLink2Description=https://katalog.we-online.de/em/datasheet/6130xx11121.pdf?src-supplier=Digi-Key, ComponentLink2URL=https://katalog.we-online.de/em/datasheet/6130xx11121.pdf?src-supplier=Digi-Key, Connector Type="Male Pin", Contact Material=Copper, Contact Mating Length=0.236inch, Contact Plating=Gold, Gender=Male, Lead Free="Lead Free", Manufacturer Part Number=61300411121, Mount="Through Hole", Number of Contacts=4, Number of Positions=4, Number of Rows=1, Packaging=Bulk, Pitch=0.1inch, Pricing 1="5=0,19600, 250=0,08000, 500=0,07800, 2500=0,07500, 5000=0,07200 (USD)", REACH SVHC=Unknown, RoHS=Yes, RoHS Compliant=Yes, Stock 1=380, Supplier 1=RSComponents, Termination=Solder
Q1: "Dual N-Channel Enhancement Mode Power MOSFET", Case/Package=SOT23-6
R1 R2 R7: library part RK73H1JTTD1001F, "1KΩ ±1% 1/8W ±100ppm/℃ 0603", Case Code (Imperial)=0603, Case Code (Metric)=1608, Manufacturer="KOA Speer", Max Operating Temperature=155°C, Min Operating Temperature=-55°C, Package Quantity=5000, Power Rating=125mW, Resistance=1kR, Resistor Type="Thick Film", Temperature Coefficient=100ppm/°C, Tolerance=1%, Voltage Rating=75V, Voltage Rating (DC)=50V, Case/Package=0603, Category=Resistors, ComponentLink1Description=https://datasheet.ciiva.com/15159/getdatasheetpartid-87490-15159861.pdf?src-supplier=Verical, ComponentLink1URL=https://datasheet.ciiva.com/15159/getdatasheetpartid-87490-15159861.pdf?src-supplier=Verical, ComponentLink2Description=https://datasheet.ciiva.com/48426/rk73h-series-eng-jap-tds-48426519.pdf?src-supplier=Distrelec, ComponentLink2URL=https://datasheet.ciiva.com/48426/rk73h-series-eng-jap-tds-48426519.pdf?src-supplier=Distrelec, Depth=0.8mm, Height=0.45mm, Lead Free="Lead Free", Length=1.6mm, Manufacturer Part Number=RK73H1JTTD1001F, Military Standard=Not, Number of Pins=2, Packaging="Cut Tape", Pricing 1="1=0,04800 (USD)", REACH SVHC=Unknown, RoHS=Yes, RoHS Compliant=Yes, Series=RK73H, Stock 1=1, Supplier 1="Arrow Electronics", Supplier Part Number 1=RK73H1JTTD1001F, Technology="THICK FILM", Termination=SMD/SMT, Weight=0.000811oz, Width=0.8mm
R3 R5: library part RC0603FR-072KL, "2000Ω ± 1.00% 0.1W ± 100ppm/℃ 0603", Case Code (Imperial)=0603, Case Code (Metric)=1608, Manufacturer=Yageo, Max Operating Temperature=155°C, Max Power Dissipation=100mW, Min Operating Temperature=-55°C, Package Quantity=1, Resistance=2kR, Resistance Tolerance=1%, Resistor Type="Thick Film", Supplier Part Number 1=1995523, Temperature Coefficient=100ppm/°C, Voltage Rating=50V, Working Voltage=75V, Case/Package=0603, Category=Resistors, ComponentLink1Description=https://datasheet.ciiva.com/11808/0900766b80f96399-11808134.pdf?src-supplier=RSComponents, ComponentLink1URL=https://datasheet.ciiva.com/11808/0900766b80f96399-11808134.pdf?src-supplier=RSComponents, ComponentLink2Description=https://datasheet.ciiva.com/22747/443971-22747526.pdf?src-supplier=Element14, ComponentLink2URL=https://datasheet.ciiva.com/22747/443971-22747526.pdf?src-supplier=Element14, ComponentLink3Description=https://datasheet.ciiva.com/2453/pyu-r-int-thick-7-2453913.pdf?src-supplier=Digi-Key, ComponentLink3URL=https://datasheet.ciiva.com/2453/pyu-r-int-thick-7-2453913.pdf?src-supplier=Digi-Key, ComponentLink4Description=https://datasheet.ciiva.com/12555/rc0603-272842-12555257.pdf?src-supplier=Mouser, ComponentLink4URL=https://datasheet.ciiva.com/12555/rc0603-272842-12555257.pdf?src-supplier=Mouser, ComponentLink5Description=https://datasheet.ciiva.com/2453/pyu-r-int-thick-7-2453914.pdf?src-supplier=Digi-Key, ComponentLink5URL=https://datasheet.ciiva.com/2453/pyu-r-int-thick-7-2453914.pdf?src-supplier=Digi-Key, ComponentLink6Description=https://datasheet.ciiva.com/2453/pyu-r-int-thick-7-2453915.pdf?src-supplier=Digi-Key, ComponentLink6URL=https://datasheet.ciiva.com/2453/pyu-r-int-thick-7-2453915.pdf?src-supplier=Digi-Key, Construction=Rectangular, Depth=0.8mm, Features="Moisture Resistant", Height=0.45mm, Lead Free="Lead Free", Length=1.6mm, Manufacturer Part Number=RC0603FR-072KL, Military Standard=Not, Number of Pins=2, Number of Terminations=2, Packaging="Tape and Reel", Power Rating=100mW, Pricing 1="5000=0,00400, 10000=0,00300, 15000=0,00300, 20000=0,00300 (GBP)", REACH SVHC="No SVHC", RoHS=Yes, RoHS Compliant=Yes, Series=RC, Stock 1=1700, Supplier 1=RSComponents, Technology="THICK FILM", Termination=SMD/SMT, Tolerance=1%, Voltage Rating (DC)=50V, Width=0.031inch
R4: library part CRGP2512F100R, "Res Thick Film 2512 100 Ohm 1% 2W ±100ppm/C Pad SMD T/R", Case Code (Imperial)=2512, Case Code (Metric)=6432, Manufacturer="TE Connectivity", Max Operating Temperature=155°C, Max Power Dissipation=2W, Min Operating Temperature=-55°C, Resistance=100R, Resistor Type="Thick Film", Supplier Part Number 1=1764326, Temperature Coefficient=200ppm/°C, Tolerance=1%, Case/Package=2512, Category=Resistors, ComponentLink1Description=https://4donline.ihs.com/images/VipMasterIC/IC/TYEL/TYEL-S-A0005460475/TYEL-S-A0005460475-1.pdf?hkey=52A5661711E402568146F3353EA87419&src-supplier=Farnell, ComponentLink1URL=https://4donline.ihs.com/images/VipMasterIC/IC/TYEL/TYEL-S-A0005460475/TYEL-S-A0005460475-1.pdf?hkey=52A5661711E402568146F3353EA87419&src-supplier=Farnell, ComponentLink2Description=https://www.te.com/commerce/DocumentDelivery/DDEController?Action=srchrtrv&amp;DocNm=9-1773463-9&amp;DocType=DS&amp;DocLang=English&src-supplier=Digi-Key, ComponentLink2URL=https://www.te.com/commerce/DocumentDelivery/DDEController?Action=srchrtrv&amp;DocNm=9-1773463-9&amp;DocType=DS&amp;DocLang=English&src-supplier=Digi-Key, ComponentLink3Description=https://4donline.ihs.com/images/VipMasterIC/IC/TYEL/TYEL-S-A0005460475/TYEL-S-A0005460475-1.pdf?hkey=52A5661711E402568146F3353EA87419&src-supplier=Newark, ComponentLink3URL=https://4donline.ihs.com/images/VipMasterIC/IC/TYEL/TYEL-S-A0005460475/TYEL-S-A0005460475-1.pdf?hkey=52A5661711E402568146F3353EA87419&src-supplier=Newark, Manufacturer Part Number=CRGP2512F100R, Number of Terminations=2, Packaging="Cut Tape", Pricing 1="4000=0,10900, 12000=0,10100, 20000=0,09100 (USD)", RoHS=Yes, RoHS Compliant=Yes, Stock 1=1, Supplier 1=RSComponents
R6: library part RC0603FR-077K5L, "7500Ω ± 1.00% 0.1W ± 100ppm/℃ 0603", Case Code (Imperial)=0603, Case Code (Metric)=1608, Manufacturer=Yageo, Max Operating Temperature=155°C, Max Power Dissipation=100mW, Min Operating Temperature=-55°C, Package Quantity=1, Resistance=7.5kR, Resistance Tolerance=1%, Resistor Type="Thick Film", Supplier Part Number 1=68R0113, Temperature Coefficient=100ppm/°C, Voltage Rating=50V, Working Voltage=75V, Case/Package=0603, Category="Chip SMD Resistors", ComponentLink1Description=https://datasheet.ciiva.com/11808/0900766b80f96399-11808401.pdf?src-supplier=RSComponents, ComponentLink1URL=https://datasheet.ciiva.com/11808/0900766b80f96399-11808401.pdf?src-supplier=RSComponents, ComponentLink2Description=https://datasheet.ciiva.com/2519/pyu-r-int-thick-7-2519120.pdf?src-supplier=Digi-Key, ComponentLink2URL=https://datasheet.ciiva.com/2519/pyu-r-int-thick-7-2519120.pdf?src-supplier=Digi-Key, ComponentLink3Description=https://datasheet.ciiva.com/12555/rc0603-272842-12555256.pdf?src-supplier=Mouser, ComponentLink3URL=https://datasheet.ciiva.com/12555/rc0603-272842-12555256.pdf?src-supplier=Mouser, ComponentLink4Description=https://datasheet.ciiva.com/46395/443971-46395019.pdf?src-supplier=Element14, ComponentLink4URL=https://datasheet.ciiva.com/46395/443971-46395019.pdf?src-supplier=Element14, ComponentLink5Description=https://datasheet.ciiva.com/2519/pyu-r-int-thick-7-2519121.pdf?src-supplier=Digi-Key, ComponentLink5URL=https://datasheet.ciiva.com/2519/pyu-r-int-thick-7-2519121.pdf?src-supplier=Digi-Key, ComponentLink6Description=https://datasheet.ciiva.com/2519/pyu-r-int-thick-7-2519122.pdf?src-supplier=Digi-Key, ComponentLink6URL=https://datasheet.ciiva.com/2519/pyu-r-int-thick-7-2519122.pdf?src-supplier=Digi-Key, ComponentLink7Description=https://datasheet.ciiva.com/15189/getdatasheetpartid-326523-15189821.pdf?src-supplier=Verical, ComponentLink7URL=https://datasheet.ciiva.com/15189/getdatasheetpartid-326523-15189821.pdf?src-supplier=Verical, Construction=Rectangular, Depth=0.8mm, Features="Moisture Resistant", Height=0.45mm, Lead Free="Lead Free", Length=1.6mm, Manufacturer Part Number=RC0603FR-077K5L, Military Standard=Not, Number of Pins=2, Number of Terminations=2, Packaging="Tape and Reel", Power Rating=100mW, Pricing 1="1=0,10000, 25=0,01800, 50=0,01300, 100=0,00700 (USD)", REACH SVHC="No SVHC", RoHS=Yes, RoHS Compliant=Yes, Series=RC, Stock 1=2709, Supplier 1=Newark, Technology="THICK FILM", Termination=SMD/SMT, Tolerance=1%, Voltage Rating (DC)=50V, Width=0.031inch
R8 R9: library part CMP-1659-00013-4, "Chip Resistor, 10 KOhm, +/- 1%, 0.125 W, -55 to 155 degC, 0805 (2012 Metric), RoHS, Tape and Reel", Manufacturer=Yageo, Max Operating Temperature="155 degC", Min Operating Temperature="-55 degC", Package Quantity=5000, Voltage Rating="150 V", ComponentLink1Description="Manufacturer URL", ComponentLink1URL=http://www.yageo.com/, ComponentLink2Description=Datasheet, ComponentLink2URL=http://www.yageo.com/documents/recent/PYu-RC_Group_51_RoHS_L_04.pdf, DatasheetVersion="Rev. 4, 02/2016", Height="0.5 mm", Length="2 mm", Mount="Surface Mount", Mounting Technology="Surface Mount", PackageDescription="2-Pin Surface Mounted Device, Body 2 x 1.25 mm", PackageReference=0805, Packaging="Tape and Reel", Pins=2, REACH SVHC="No SVHC", RoHSCompliant=true